# Altium PCB Master.PcbDoc
Units mm, origin at the board's own origin, x right, y up, seen from the top; angles counter-clockwise.
Board outline 150 x 100 mm, 2 copper layers (Top Layer, Bottom Layer); 20 components, 17 nets, 82 pads, 0 vias.
Unrouted connection lines stored in the file: 41.
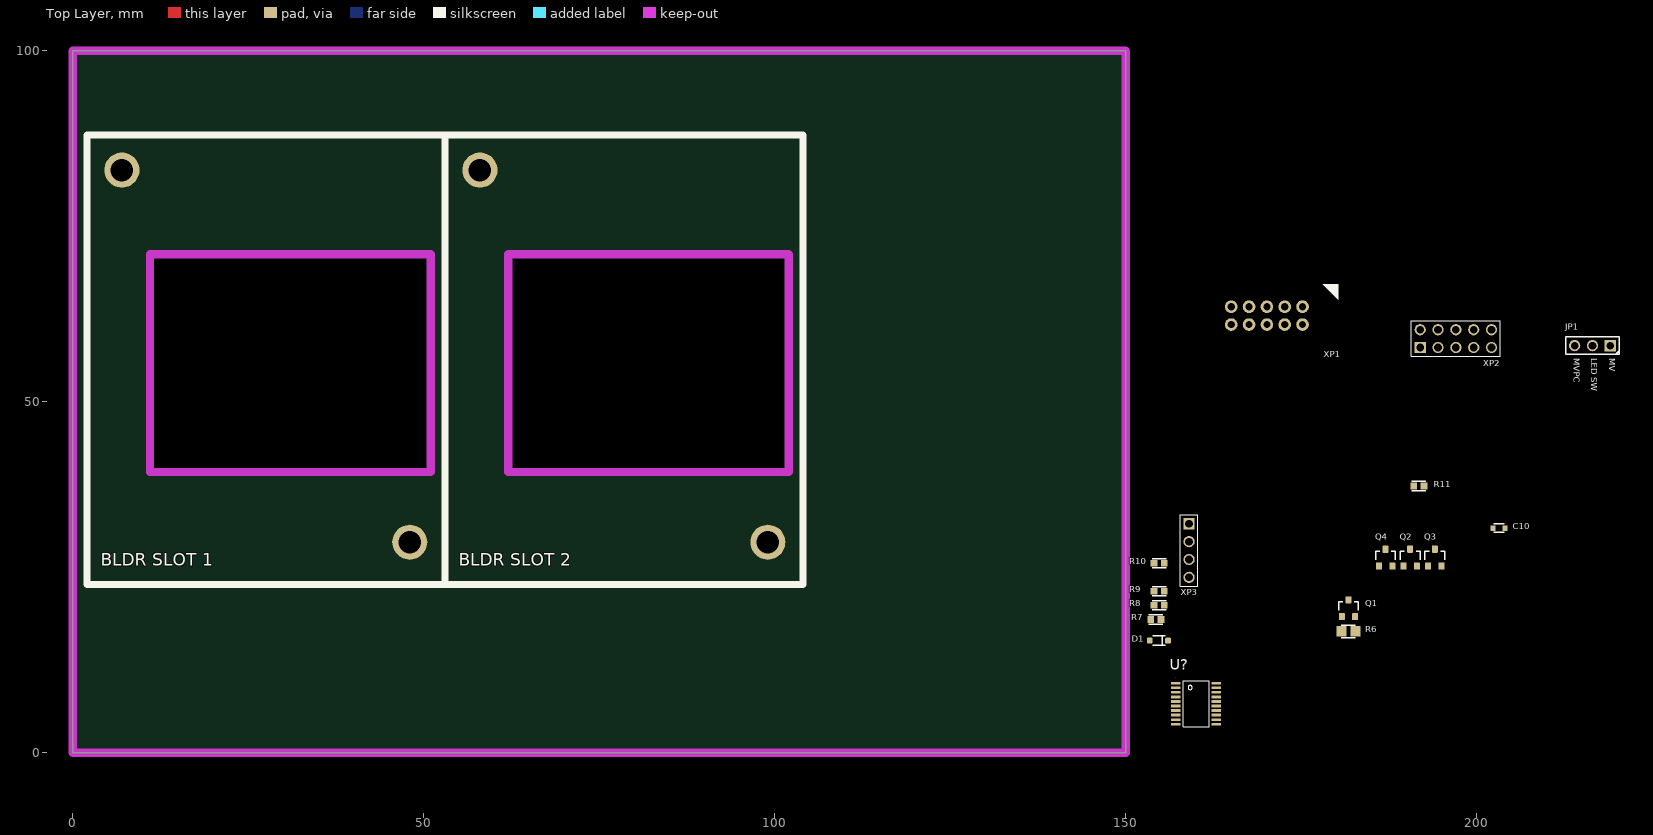
[diagram p0: Top Layer view]
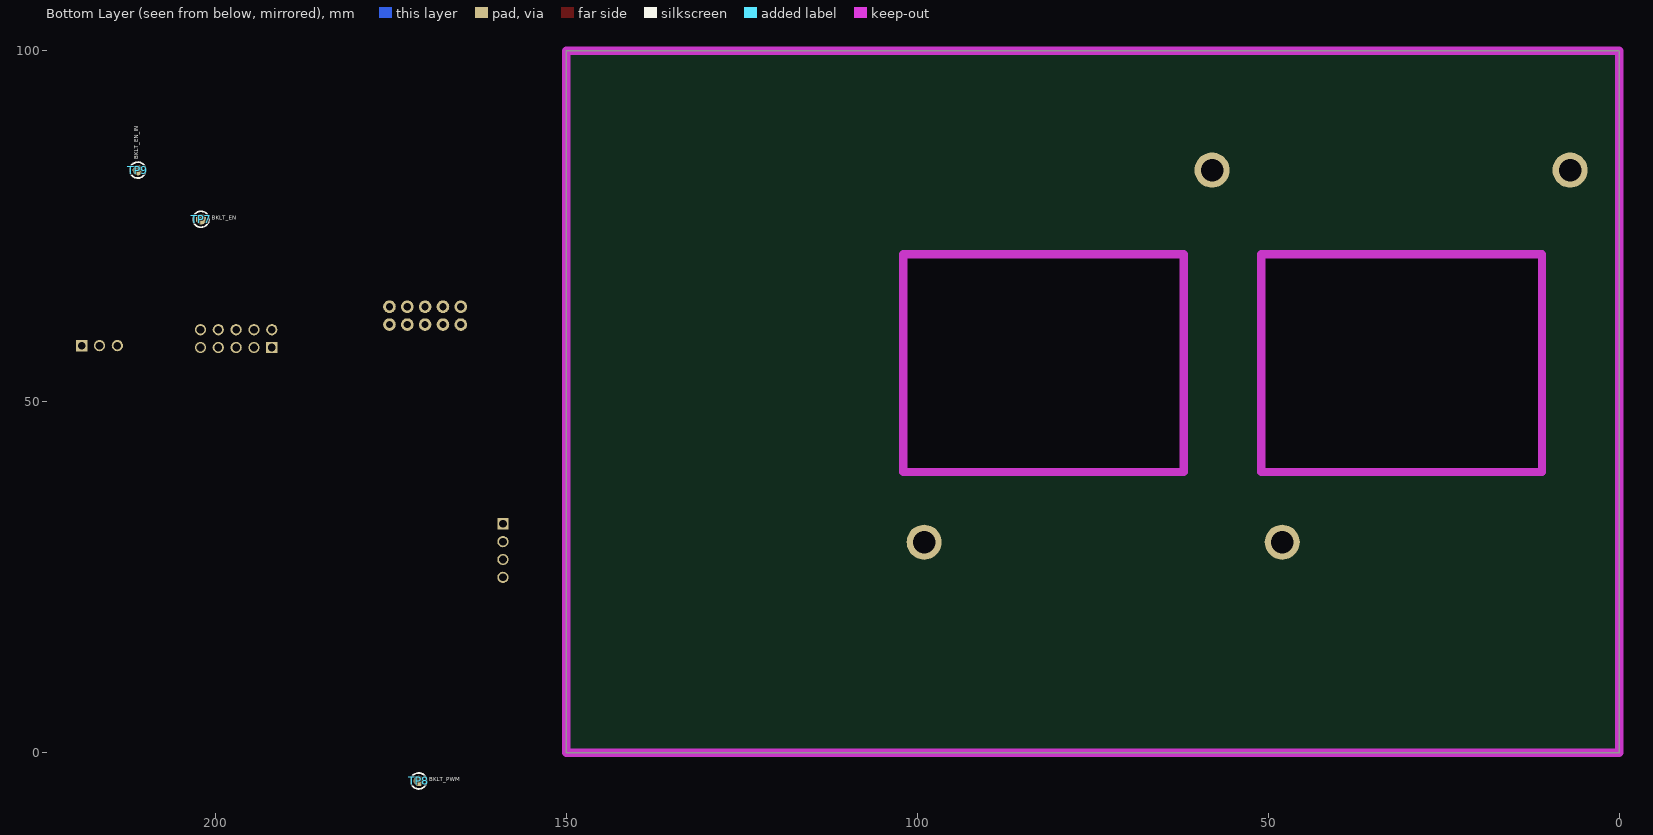
[diagram p1: Bottom Layer view, seen from below]

## Layer stack, top to bottom
Top Solder: solder mask 0.0102, Solder Resist, Dk 3.5
Top Layer: signal copper 0.0356
Dielectric 1: dielectric 0.32, FR-4, Dk 4.8
Bottom Layer: signal copper 0.0356
Bottom Solder: solder mask 0.0102, Solder Resist, Dk 3.5

## Board outline
0,0 150,0 150,100 0,100
cut-out: 11,71 51,71 51,40 11,40
cut-out: 102,71 62,71 62,40 102,40

## Design rules (kind name [scope] priority, off if disabled: settings)
Clearance [All] p1: gap=0.254 ignorepadtopadclearanceinfootprint=FALSE except(0: Arc-Hole Track-Hole SMDPad-Hole THPad-Hole Via-Hole Fill-Hole Poly-Hole Region-Hole Text-Hole)
PolygonConnect [All] p1: connectstyle=Relief reliefconductorwidth=0.254 reliefentries=4 polygonreliefangle="90 Angle" airgapwidth=0.254
RoutingVias [All] p1: holewidth=0.711 width=1.27 viastyle="Through Hole" minholewidth=0.711 minwidth=1.27 maxholewidth=0.711 maxwidth=1.27
SolderMaskExpansion [All] p1: expansion=0.102
Width [All] p1: maxlimit=3 minlimit=0.254 preferedwidth=0.254
30 further rules are at their usual default settings.

## Components (designator, comment, footprint, x,y, rotation, side; value= is the part's Value field where it differs from the comment)
C10 "0603-X7R-50-0.1 мкф" CAP_0603 203.15,32 r180 top
D1 "BZX384B5V1" "SOD_323 (SC-76)" 154.7,16 r0 top
JP1 "" "CONN_JUMPER 3PIN 2.54MM" 219,58 r180 top
Q1 "MMUN2214LT1G" SOT_23 181.7,20.6 r0 top
Q2 "MMUN2214LT1G" SOT_23 190.5,27.8 r0 top
Q3 "MMUN2214LT1G" SOT_23 194,27.8 r0 top
Q4 "MMUN2214LT1G" SOT_23 187,27.8 r0 top
R6 "0805-100 J" resistor_0805 181.7,17.3 r180 top value=100
R7 "0603-10к J" resistor_0603 154.275,19 r0 top value=10k
R8 "0603-4.7 к J" resistor_0603 154.725,21 r0 top value=4.7k
R9 "0603-4.7 к J" resistor_0603 154.725,23 r180 top value=4.7k
R10 "0603-4.7 к J" resistor_0603 154.725,27 r180 top value=4.7k
R11 "0603-4.7 к J" resistor_0603 191.725,38 r180 top value=4.7k
TP7 "BKLT_EN" OTHER_SMD_TP_1.5MM 202,76 r180 bottom
TP8 "BKLT_PWM" OTHER_SMD_TP_1.5MM 171,-4 r180 bottom
TP9 "BKLT_EN_IN" OTHER_SMD_TP_1.5MM 211,83 r90 bottom
U? "STM32F030F4P6" TSSOP_20 160,7 r0 top
XP1 "IDC-10" CONN_IDC-10 170.08,62.27 r90 top
XP2 "PLD-10" CONN_PLD-10 197,59 r0 top
XP3 "PLS-4" CONN_PLS-4 159,28.81 r270 top

## Footprints (in the part's own frame and the unit in brackets; to place one, negate y for a bottom-side part, rotate by r counter-clockwise, add the part's x,y. Pads: shape width x height; smd on the part's side, far side on the other; paste and mask are expansions set on the pad)
CAP_0603 [mm] "Chip Capacitor, 2-Leads, Body 1,60x0,80mm, IPC Medium Density"
  rect 0.7x0.8 smd: 1(-0.85,0) 2(0.85,0)
  silkscreen extent -0.75,-0.6 0.75,0.6, body extent -0.8,-0.41 0.8,0.41, height 0.92
CONN_IDC-10 [mm]
  round 1.8 hole 1.02: 1(1.27,-5.08) 2(-1.27,-5.08) 3(1.27,-2.54) 4(-1.27,-2.54) 5(1.27,0) 6(-1.27,0) 7(1.27,2.54) 8(-1.27,2.54) 9(1.27,5.08) 10(-1.27,5.08)
  silkscreen extent 2.3,-10.18 4.5,-7.98, body extent -4.6,-10.2 4.4,10.15, height 9.1
"CONN_JUMPER 3PIN 2.54MM" [mm] "3 pins, 1 row"
  rect 1.6x1.6 hole 1.1: 1(0,0)
  round 1.6 hole 1.1: 2(2.54,0) 3(5.08,0)
  silkscreen extent -1.27,-1.28 6.35,1.26, body extent -1.27,-1.24 6.35,1.25, height 8.54
CONN_PLD-10 [mm]
  rect 1.6x1.6 hole 1.1: 1(-5.08,-1.27)
  round 1.6 hole 1.1: 2(-5.08,1.27) 3(-2.54,-1.27) 4(-2.54,1.27) 5(0,-1.27) 6(0,1.27) 7(2.54,-1.27) 8(2.54,1.27) 9(5.08,-1.27) 10(5.08,1.27)
  silkscreen extent -6.35,-2.54 6.35,2.54, body extent -6.35,-2.54 6.35,2.54, height 8.5
CONN_PLS-4 [mm]
  rect 1.6x1.6 hole 1.1: 1(-3.81,0)
  round 1.6 hole 1.1: 2(-1.27,0) 3(1.27,0) 4(3.81,0)
  silkscreen extent -5.08,-1.27 5.08,1.27, body extent -5.08,-1.27 5.08,1.27, height 8.5
OTHER_SMD_TP_1.5MM [mm] "Test point"
  round 1.5 smd: 1(0,0)
  silkscreen extent -1.14,-1.14 1.14,1.14
resistor_0603 [mm] "Chip Capacitor, 2-Leads, Body 1,60x0,80mm, IPC Medium Density"
  rect 0.95x0.95 smd: 1(-0.725,0) 2(0.725,0)
  silkscreen extent -1,-0.65 1,0.65, body extent -0.8,-0.4 0.8,0.4, height 0.5
resistor_0805 [mm] "Chip Resistor, 2-Leads, Body 2,00x1,25mm, IPC Medium Density"
  rect 1.4x1.5 smd: 1(-1,0) 2(1,0)
  silkscreen extent -1,-0.9 1,0.9, body extent -1,-0.6 1,0.6, height 0.5
"SOD_323 (SC-76)" [mm]
  rrect30% 0.8x0.8 smd: A(-1.3,0) C(1.3,0)
  silkscreen extent -0.9,-0.7 0.9,0.7, body extent -1.35,-0.65 1.35,0.6, height 1.1
SOT_23 [mm] "SOT-23; 3 Leads; Body 3.0 x 2.5 mm, inc. leads (LxW max)"
  rrect20% 0.85x1 smd: 1(-0.95,-1.2) 2(0.95,-1.2) 3(0,1.2)
  silkscreen extent -1.4,-0.3 1.4,0.9, body extent -1.5,-1.5 1.5,1.5, height 1.3
TSSOP_20 [mm] "TSSOP, 20-Leads, Body 6,50x4,40mm, Pitch 0,65mm, IPC Medium Density"
  rect 1.35x0.4 smd: 1(-2.875,2.925) 2(-2.875,2.275) 3(-2.875,1.625) 4(-2.875,0.975) 5(-2.875,0.325) 6(-2.875,-0.325) 7(-2.875,-0.975) 8(-2.875,-1.625) 9(-2.875,-2.275) 10(-2.875,-2.925) 11(2.875,-2.925) 12(2.875,-2.275) 13(2.875,-1.625) 14(2.875,-0.975) 15(2.875,-0.325) 16(2.875,0.325) 17(2.875,0.975) 18(2.875,1.625) 19(2.875,2.275) 20(2.875,2.925)
  silkscreen extent -1.85,-3.3 1.85,3.3, body extent -3.2,-3.3 3.2,3.3, height 1.2

## Part data
C10: "Конденсатор Чип Керамический", Voltage=50V, Cap=0.1u, Foot=0603, Price, $=0.1
JP1: library part "CONN_JUMPER 2.54 MM"
Q1 Q2 Q3 Q4: library part "MMUN2214LT1G_50V 0.1A 0.25W", "NPN Digital Transistor", PackageDocument=May-1999, DatasheetDocument=Jun-1999, PackageReference=SOT23, Published=17-Sep-2003, Publisher="Altium Limited"
R6: "Резистор Чип", Power=0.125W, Foot=0805
R7: library part "0603-10 к J", "Резистор Чип", Power=0.1W, Foot=0603, Price, $=0.015
R8 R9 R10 R11: "Резистор Чип", Power=0.1W, Foot=0603, Price, $=0.015
TP7 TP8 TP9: library part "Test Point_1.5MM"
U?: library part MCU_STM32F030F4P6, "Микроконтроллер 32-Бит, Cortex-M0, 48МГц, 16КБ Flash", Package="TQFP-32 Microchip Technology", Availability=Unavailable, MF="Microchip Technology", MP=ATMEGA8-16AU, Price=None, SnapEDA_Link=https://www.snapeda.com/parts/ATMEGA8-16AU/Microchip/view-part/4246640/?ref=snap
XP1: library part "CONN_IDC-10 (Single Row)", "Header, 10-Pin", LatestRevisionDate=17-Jul-2002, LatestRevisionNote="Re-released for DXP Platform.", Publisher="Altium Limited"
XP2: library part "CONN_Header 10 (Single Row)_1", "Header, 10-Pin", LatestRevisionDate=17-Jul-2002, LatestRevisionNote="Re-released for DXP Platform.", Publisher="Altium Limited"
XP3: library part CONN_PLS-4, "Header, 4-Pin", LatestRevisionDate=17-Jul-2002, LatestRevisionNote="Re-released for DXP Platform.", Publisher="Altium Limited"
D1: HelpURL="L:\Dev\Техническая документация\Стабилитроны\BZX384_series_Vishay.pdf", Price, $=0.3

## Free pads (board coordinates)
  round 5 hole 3.2: 4(48,30) 5(99,30) 6(58,83) 7(7,83)

## Nets (pads, with @x,y where several pads share a name; then routed paths per layer and width w, separated by ;. In a path a pad name is that pad's centre, name@x,y a point inside that pad or via, vN(x,y) a via of type N, cw(c..) or ccw(c..) an arc to the next point about the centre after c; other vN are vias at no path point)
+12: R9.2 XP2.1 XP2.2 XP2.3 XP3.1
ENABLE_OUT: Q3.3 R10.1 TP7.1 XP2.7 XP2.8
GND: C10.2 D1.A JP1.1 Q2.2 Q3.2 Q4.2 XP1.3 XP1.4 XP2.4 XP2.5 XP2.6 XP3.4
NetC10_1: C10.1 Q2.1 R8.2
NetJP1_2: JP1.2 Q1.2
NetQ1_3: Q1.3 R6.1
NetQ2_3: Q2.3 Q3.1 R9.1
NetR6_2: R6.2 XP1.7 XP1.8
ON: R7.2 R8.1 TP9.1 XP3.3
ON_INV: D1.C R7.1
PLED_N: JP1.3 XP3.2
POT1: XP1.5
POT2: XP1.6
PWM_INV: Q4.1
PWM_LED: Q1.1
PWM_OUT: Q4.3 R11.1 TP8.1 XP2.9 XP2.10
VCC: R10.2 R11.2 XP1.1 XP1.2 XP1.9 XP1.10
pads on no net: U?.1 U?.2 U?.3 U?.4 U?.5 U?.6 U?.7 U?.8 U?.9 U?.10 U?.11 U?.12 U?.13 U?.14 U?.15 U?.16 U?.17 U?.18 U?.19 U?.20

## Polygon pours and split planes (outlines as drawn)
no net on Top Layer "Top Layer-No Net" (solid, pour order 4): 65.54,47

## Keep-outs
Keep-Out Layer:
  lines w1.2: 0,0 0,100 150,100 150,0 0,0 ; 11,40 11,71 51,71 51,40 11,40 ; 62,40 102,40 102,71 62,71 62,40

## Other copper
Top Layer:
  pour cut-out: 67,56

## Silkscreen, mask and mechanical layers (free items; w line width, h text height)
Top Overlay:
  lines w1: 53,24 104,24 104,88 53,88 ; 53,24 53,88 ; 53,24 2,24 2,87 2,88 3,88 53,88
  text "MVPC" at 213.42,56.2 h1.52 r270
  text "LED SW" at 215.92,56.2 h1.52 r270
  text "MV" at 218.52,56.2 h1.52 r270
  text "BLDR SLOT 1" at 4,26 h3
  text "BLDR SLOT 2" at 55,26 h3